# EAGLE board schematic3 (EAGLE 7.6.0)
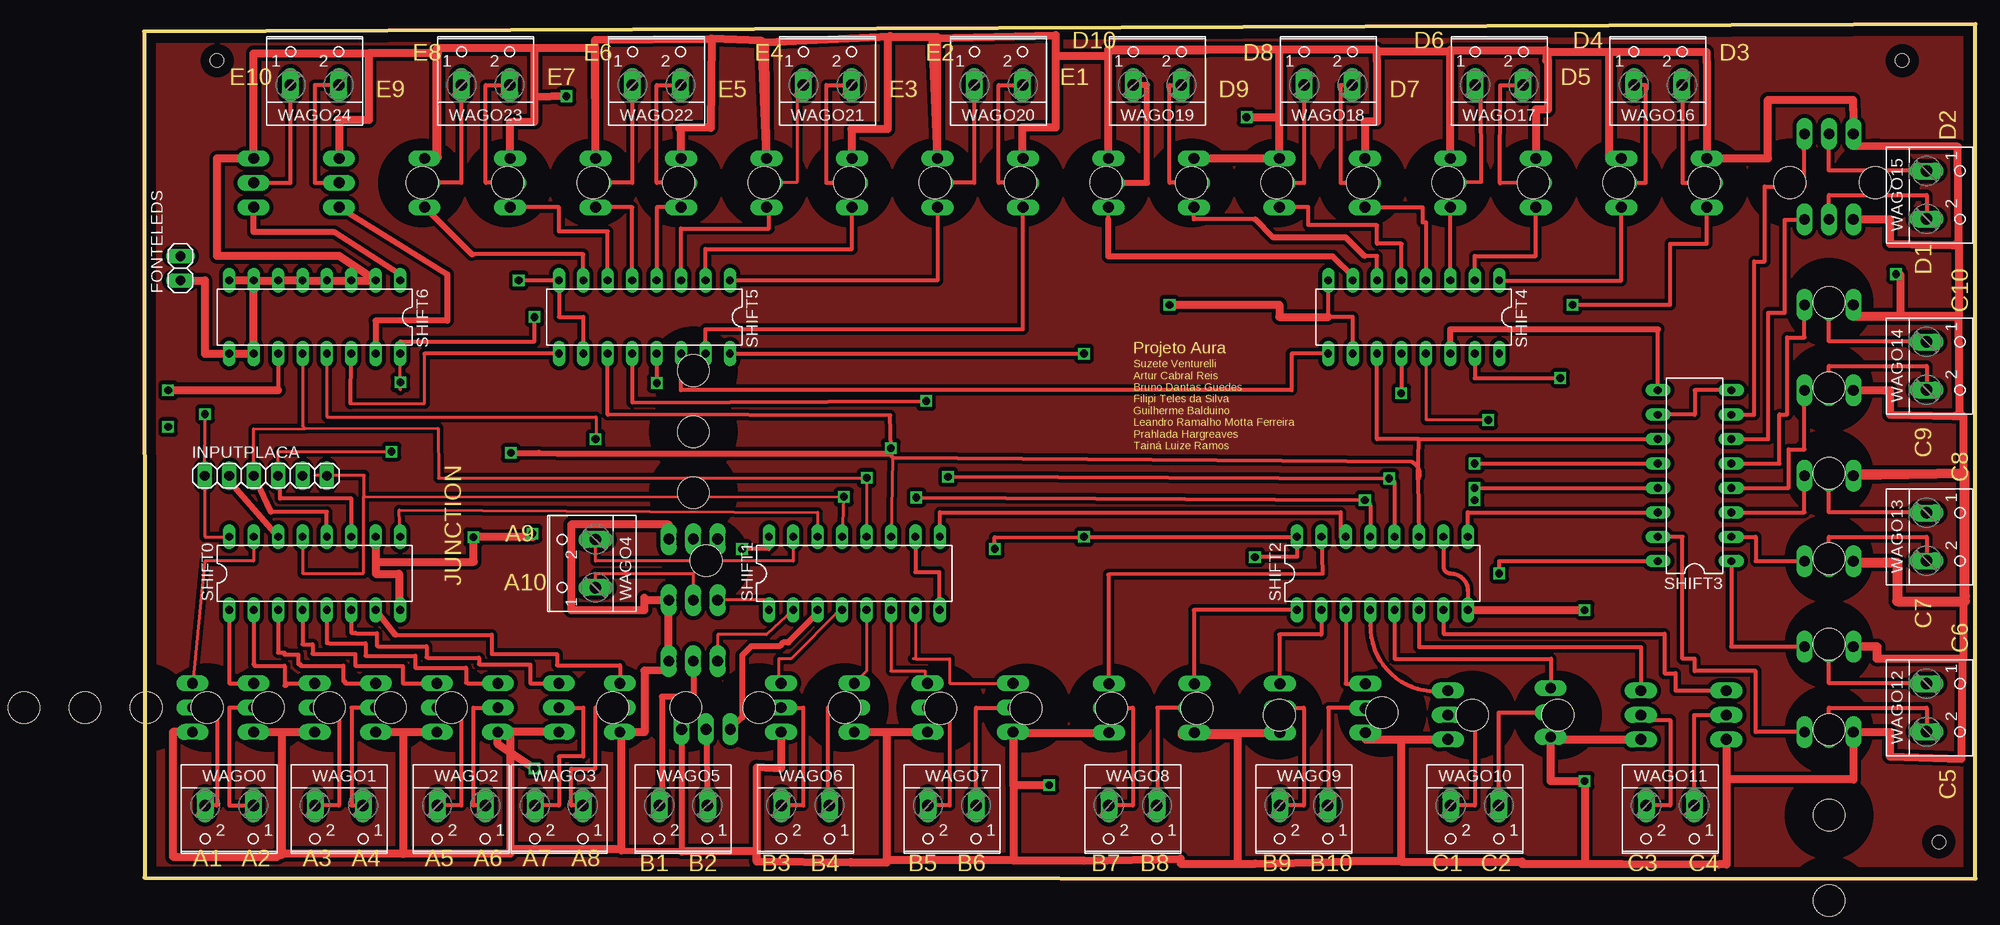
[diagram p0: board, top side]
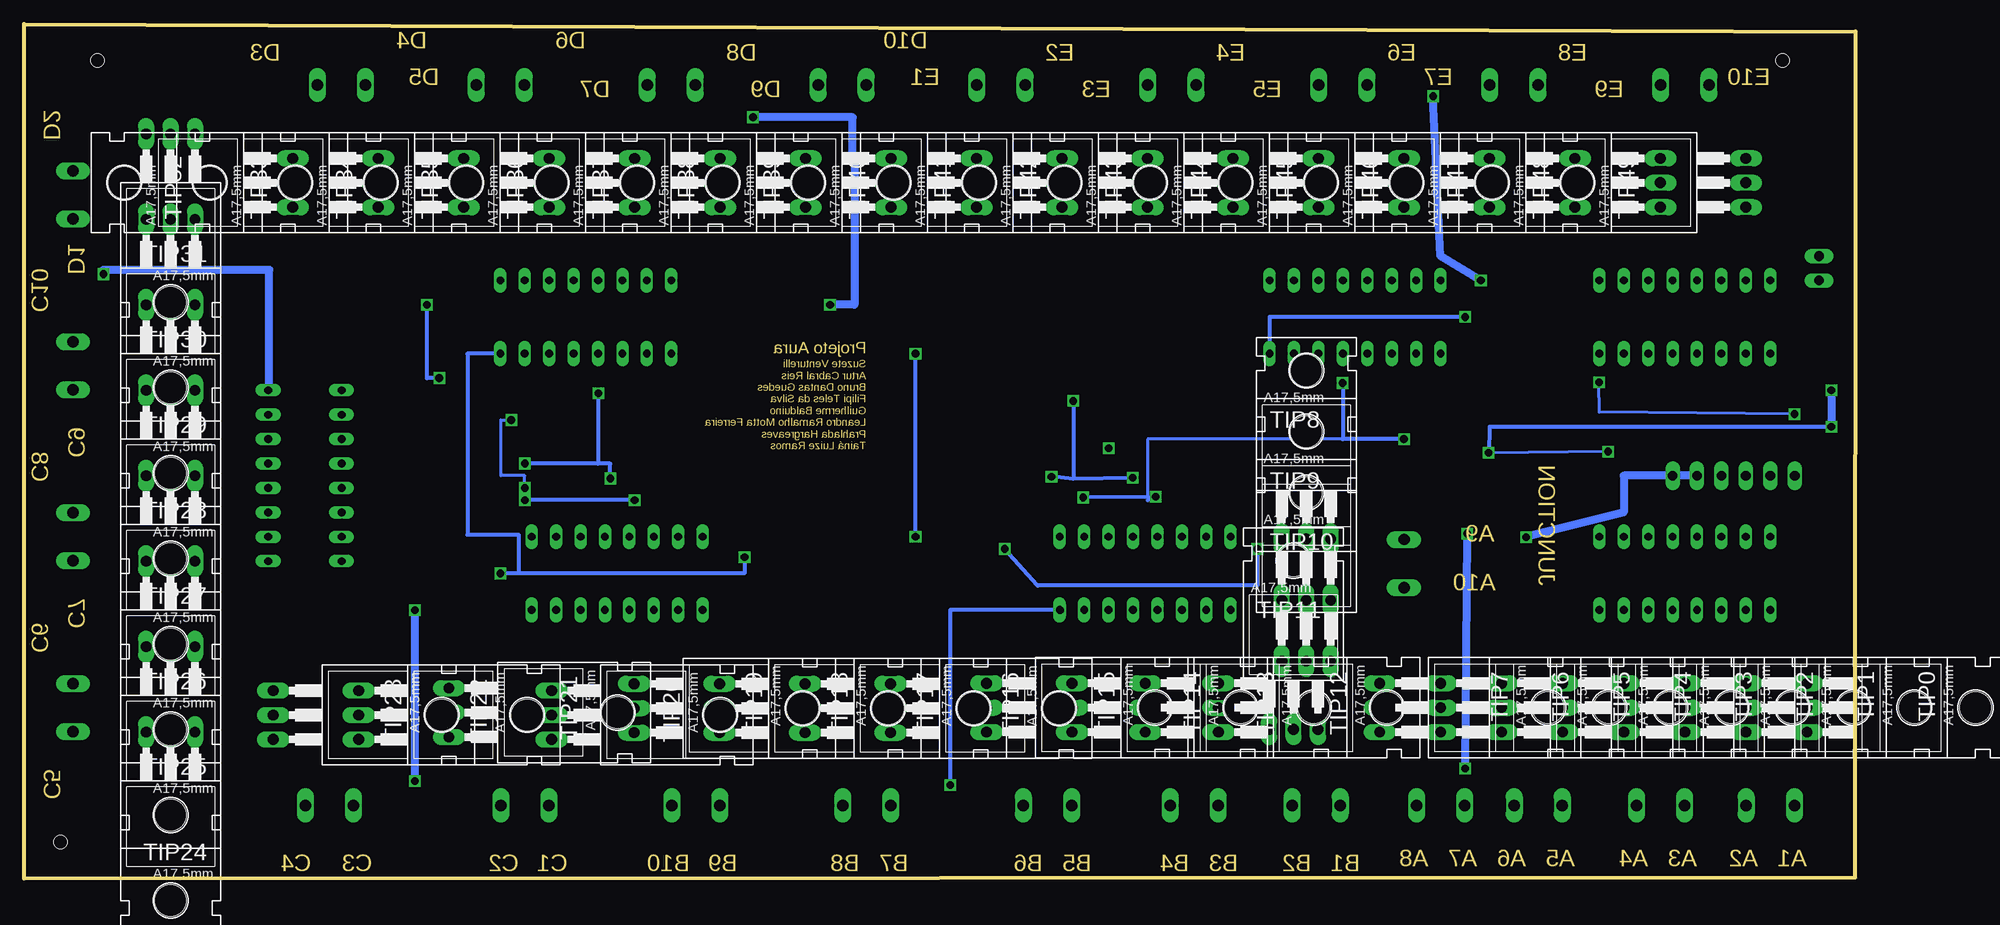
[diagram p1: board, bottom side, seen from below]

Size 190.45 x 88.9 mm. Coordinates in mm from the lower left corner, seen from the top.
Outline: 0.05,0.09 190.45,0 190.45,88.9 0,88.1 0.05,0.09
Copper layers (1*16): Top 0.035mm / dielectric 1.5mm / Bottom 0.035mm
Design rules "default": minimum track width 10mil, minimum drill 24mil, track to track 8mil, track to pad 8mil, pad to pad 8mil, via to via 8mil, smd to smd 8mil, copper to edge 40mil, drill to drill 8mil, minimum pad ring 10mil, minimum via ring 8mil, stop-mask expansion 4mil, vias tented up to drill 0mil, thermal gap 10mil
Holes 1.4 mm at 7.57,85.09 182.83,85.09 186.64,3.81 -16.56,34.29

## Footprints (pad centres in the part's own frame; a part is rotated, then mirrored left to right if it is on the bottom)
1X02 = drill 1.016 long: 1 -1.27,0; 2 1.27,0
1X06 = drill 1.016 long: 1 -6.35,0; 2 -3.81,0; 3 -1.27,0; 4 1.27,0; 5 3.81,0; 6 6.35,0
DIL16 = drill 0.813 long: 1 -8.89,-3.81; 2 -6.35,-3.81; 3 -3.81,-3.81; 4 -1.27,-3.81; 5 1.27,-3.81; 6 3.81,-3.81; 7 6.35,-3.81; 8 8.89,-3.81; 9 8.89,3.81; 10 6.35,3.81; 11 3.81,3.81; 12 1.27,3.81; 13 -1.27,3.81; 14 -3.81,3.81; 15 -6.35,3.81; 16 -8.89,3.81
TO220AH = drill 1.118 long: B -2.54,-6.35; C 0,-6.35; E 2.54,-6.35 | hole 3.302: 0,11.176
W237-102 = drill 1.194 long: 1 -2.5,-1.27; 2 2.5,-1.27

## Placement (x,y rotation side)
FONTELEDS  [1X02]  3.76,63.5 90 top
INPUTPLACA  [1X06]  12.65,41.91 0 top
SHIFT0  74HC595N  [DIL16]  17.73,31.75 0 top
SHIFT1  74HC595N  [DIL16]  73.85,31.75 0 top
SHIFT2  74HC595N  [DIL16]  128.77,31.75 0 top
SHIFT3  74HC595N  [DIL16]  161.24,41.91 90 top
SHIFT4  74HC595N  [DIL16]  132.03,58.42 180 top
SHIFT5  74HC595N  [DIL16]  52.02,58.42 180 top
SHIFT6  74HC595N  [DIL16]  17.73,58.42 180 top
TIP0  TIP120  [TO220AH]  -1.32,17.78 270 bottom
TIP1  TIP120  [TO220AH]  5.03,17.78 270 bottom
TIP2  TIP120  [TO220AH]  11.38,17.78 270 bottom
TIP3  TIP120  [TO220AH]  17.73,17.78 270 bottom
TIP4  TIP120  [TO220AH]  24.08,17.78 270 bottom
TIP5  TIP120  [TO220AH]  30.43,17.78 270 bottom
TIP6  TIP120  [TO220AH]  36.78,17.78 270 bottom
TIP7  TIP120  [TO220AH]  43.13,17.78 270 bottom
TIP8  TIP120  [TO220AH]  57.1,41.67 0 bottom
TIP9  TIP120  [TO220AH]  57.1,35.32 0 bottom
TIP10  TIP120  [TO220AH]  57.1,28.97 0 bottom
TIP11  TIP120  [TO220AH]  58.43,21.89 0 bottom
TIP12  TIP120  [TO220AH]  59.88,17.78 270 bottom
TIP13  TIP120  [TO220AH]  67.5,17.78 270 bottom
TIP14  TIP120  [TO220AH]  75.12,17.78 270 bottom
TIP15  TIP120  [TO220AH]  84.01,17.78 270 bottom
TIP16  TIP120  [TO220AH]  93.99,17.72 270 bottom
TIP17  TIP120  [TO220AH]  102.88,17.72 270 bottom
TIP18  TIP120  [TO220AH]  111.77,17.72 270 bottom
TIP19  TIP120  [TO220AH]  120.66,17.72 270 bottom
TIP20  TIP120  [TO220AH]  129.24,17.02 270 bottom
TIP21  TIP120  [TO220AH]  139.91,17.27 270 bottom
TIP22  TIP120  [TO220AH]  149.31,17.02 270 bottom
TIP23  TIP120  [TO220AH]  158.2,17.02 270 bottom
TIP24  TIP120  [TO220AH]  175.21,8.89 180 bottom
TIP25  TIP120  [TO220AH]  175.21,17.78 180 bottom
TIP26  TIP120  [TO220AH]  175.21,26.67 180 bottom
TIP27  TIP120  [TO220AH]  175.21,35.56 180 bottom
TIP28  TIP120  [TO220AH]  175.21,44.45 180 bottom
TIP29  TIP120  [TO220AH]  175.21,53.34 180 bottom
TIP30  TIP120  [TO220AH]  175.21,62.23 180 bottom
TIP31  TIP120  [TO220AH]  175.21,71.12 180 bottom
TIP32  TIP120  [TO220AH]  168.86,72.39 90 bottom
TIP33  TIP120  [TO220AH]  159.97,72.39 90 bottom
TIP34  TIP120  [TO220AH]  151.08,72.39 90 bottom
TIP35  TIP120  [TO220AH]  142.19,72.39 90 bottom
TIP36  TIP120  [TO220AH]  133.3,72.39 90 bottom
TIP37  TIP120  [TO220AH]  124.41,72.39 90 bottom
TIP38  TIP120  [TO220AH]  115.52,72.39 90 bottom
TIP39  TIP120  [TO220AH]  106.63,72.39 90 bottom
TIP40  TIP120  [TO220AH]  97.74,72.39 90 bottom
TIP41  TIP120  [TO220AH]  88.85,72.39 90 bottom
TIP42  TIP120  [TO220AH]  79.96,72.39 90 bottom
TIP43  TIP120  [TO220AH]  71.07,72.39 90 bottom
TIP44  TIP120  [TO220AH]  62.18,72.39 90 bottom
TIP45  TIP120  [TO220AH]  53.29,72.39 90 bottom
TIP46  TIP120  [TO220AH]  44.4,72.39 90 bottom
TIP47  TIP120  [TO220AH]  35.51,72.39 90 bottom
TIP48  TIP120  [TO220AH]  26.62,72.39 90 bottom
TIP49  TIP120  [TO220AH]  17.73,72.39 90 bottom
WAGO0  [W237-102]  8.84,6.35 180 top
WAGO1  [W237-102]  20.27,6.35 180 top
WAGO2  [W237-102]  32.97,6.35 180 top
WAGO3  [W237-102]  43.13,6.35 180 top
WAGO4  [W237-102]  45.67,32.78 90 top
WAGO5  [W237-102]  56.07,6.35 180 top
WAGO6  [W237-102]  68.77,6.35 180 top
WAGO7  [W237-102]  84.01,6.35 180 top
WAGO8  [W237-102]  102.82,6.35 180 top
WAGO9  [W237-102]  120.6,6.35 180 top
WAGO10  [W237-102]  138.38,6.35 180 top
WAGO11  [W237-102]  158.7,6.35 180 top
WAGO12  [W237-102]  186.64,17.78 270 top
WAGO13  [W237-102]  186.64,35.56 270 top
WAGO14  [W237-102]  186.64,53.34 270 top
WAGO15  [W237-102]  186.64,71.12 270 top
WAGO16  [W237-102]  157.43,83.82 0 top
WAGO17  [W237-102]  140.92,83.82 0 top
WAGO18  [W237-102]  123.14,83.82 0 top
WAGO19  [W237-102]  105.36,83.82 0 top
WAGO20  [W237-102]  88.85,83.82 0 top
WAGO21  [W237-102]  71.07,83.82 0 top
WAGO22  [W237-102]  53.29,83.82 0 top
WAGO23  [W237-102]  35.51,83.82 0 top
WAGO24  [W237-102]  17.73,83.82 0 top

## Library data of the parts
FONTELEDS INPUTPLACA = pinhead
SHIFT0 SHIFT1-SHIFT6 = 74xx-eu
TIP0 TIP1-TIP49 = transistor-power
WAGO0 WAGO1-WAGO24 = con-wago-500; MPN: 237-102; OC_FARNELL: unknown; OC_NEWARK: 70K9898

## Nets
GNDBOARD: SHIFT0.13 SHIFT1.13 SHIFT2.13 SHIFT3.13 SHIFT4.13 SHIFT5.13 SHIFT6.13
GNDLED: FONTELEDS.1 INPUTPLACA.5 SHIFT0.8 SHIFT0.10 SHIFT1.8 SHIFT1.10 SHIFT2.8 SHIFT2.10 SHIFT3.8 SHIFT3.10 SHIFT4.8 SHIFT4.10 SHIFT5.8 SHIFT5.10 SHIFT6.2 SHIFT6.3 SHIFT6.4 SHIFT6.5 SHIFT6.6 SHIFT6.7 SHIFT6.8 SHIFT6.9 SHIFT6.10 TIP0.E TIP1.E TIP2.E TIP3.E TIP4.E TIP5.E TIP6.E TIP7.E TIP8.E TIP9.E TIP10.E TIP11.E TIP12.E TIP13.E TIP14.E TIP15.E TIP16.E TIP17.E TIP18.E TIP19.E TIP20.E TIP21.E TIP22.E TIP23.E TIP24.E TIP25.E TIP26.E TIP27.E TIP28.E TIP29.E TIP30.E TIP31.E TIP32.E TIP33.E TIP34.E TIP35.E TIP36.E TIP37.E TIP38.E TIP39.E TIP40.E TIP41.E TIP42.E TIP43.E TIP44.E TIP45.E TIP46.E TIP47.E TIP48.E TIP49.E
N$1: SHIFT0.15 TIP0.B
N$2: SHIFT0.1 TIP1.B
N$3: SHIFT0.2 TIP2.B
N$4: SHIFT0.3 TIP3.B
N$5: SHIFT0.4 TIP4.B
N$6: SHIFT0.5 TIP5.B
N$7: SHIFT0.6 TIP6.B
N$8: SHIFT0.7 TIP7.B
N$9: SHIFT1.15 TIP8.B
N$10: SHIFT1.1 TIP9.B
N$11: SHIFT6.15 TIP48.B
N$12: SHIFT1.2 TIP10.B
N$13: SHIFT4.5 TIP37.B
N$14: SHIFT1.3 TIP11.B
N$15: SHIFT1.4 TIP12.B
N$16: SHIFT4.6 TIP38.B
N$17: SHIFT1.5 TIP13.B
N$18: SHIFT4.7 TIP39.B
N$19: SHIFT1.6 TIP14.B
N$20: SHIFT5.5 TIP45.B
N$21: SHIFT1.7 TIP15.B
N$22: TIP8.C WAGO4.2
N$23: TIP9.C WAGO4.1
N$24: TIP10.C WAGO5.2
N$25: TIP11.C WAGO5.1
N$26: TIP12.C WAGO6.2
N$27: TIP13.C WAGO6.1
N$28: TIP14.C WAGO7.2
N$29: TIP15.C WAGO7.1
N$30: SHIFT2.15 TIP16.B
N$31: SHIFT2.1 TIP17.B
N$32: SHIFT2.2 TIP18.B
N$33: SHIFT2.3 TIP19.B
N$34: SHIFT2.4 TIP20.B
N$35: SHIFT2.5 TIP21.B
N$36: SHIFT2.6 TIP22.B
N$37: SHIFT2.7 TIP23.B
N$38: TIP16.C WAGO8.2
N$39: TIP17.C WAGO8.1
N$40: TIP18.C WAGO9.2
N$41: TIP19.C WAGO9.1
N$42: TIP20.C WAGO10.2
N$43: TIP21.C WAGO10.1
N$44: SHIFT4.15 TIP32.B
N$45: TIP23.C WAGO11.1
N$46: SHIFT3.15 TIP24.B
N$47: SHIFT3.1 TIP25.B
N$48: SHIFT3.2 TIP26.B
N$49: SHIFT3.3 TIP27.B
N$50: SHIFT3.4 TIP28.B
N$51: SHIFT5.6 TIP46.B
N$52: SHIFT5.7 TIP47.B
N$53: TIP0.C WAGO0.2
N$54: SHIFT3.5 TIP29.B
N$55: SHIFT3.6 TIP30.B
N$56: SHIFT3.7 TIP31.B
N$57: TIP24.C WAGO12.2
N$58: TIP25.C WAGO12.1
N$59: TIP26.C WAGO13.2
N$60: SHIFT4.1 TIP33.B
N$61: SHIFT4.2 TIP34.B
N$62: SHIFT5.9 SHIFT6.14
N$63: TIP29.C WAGO14.1
N$64: TIP30.C WAGO15.2
N$65: TIP31.C WAGO15.1
N$66: SHIFT4.3 TIP35.B
N$67: SHIFT4.4 TIP36.B
N$70: TIP1.C WAGO0.1
N$72: TIP2.C WAGO1.2
N$73: TIP32.C WAGO16.2
N$74: TIP3.C WAGO1.1
N$75: TIP33.C WAGO16.1
N$76: TIP34.C WAGO17.2
N$77: TIP37.C WAGO18.1
N$78: TIP38.C WAGO19.2
N$79: TIP39.C WAGO19.1
N$80: SHIFT5.15 TIP40.B
N$81: SHIFT5.1 TIP41.B
N$82: SHIFT5.2 TIP42.B
N$83: SHIFT5.3 TIP43.B
N$84: SHIFT5.4 TIP44.B
N$88: TIP40.C WAGO20.2
N$89: TIP41.C WAGO20.1
N$90: TIP42.C WAGO21.2
N$91: TIP45.C WAGO22.1
N$92: TIP46.C WAGO23.2
N$93: TIP47.C WAGO23.1
N$96: TIP48.C WAGO24.2
N$97: TIP49.C WAGO24.1
N$99: SHIFT6.1 TIP49.B
N$166: TIP4.C WAGO2.2
N$168: TIP5.C WAGO2.1
N$170: TIP6.C WAGO3.2
N$172: TIP7.C WAGO3.1
SERIAL: INPUTPLACA.2 SHIFT0.14
SERIAL1: SHIFT0.9 SHIFT1.14
SERIAL2: SHIFT1.9 SHIFT2.14
SERIAL3: SHIFT2.9 SHIFT3.14
SERIAL4: SHIFT3.9 SHIFT4.14
SERIAL5: SHIFT4.9 SHIFT5.14
SERIALCLK: INPUTPLACA.4 SHIFT0.11 SHIFT1.11 SHIFT2.11 SHIFT3.11 SHIFT4.11 SHIFT5.11 SHIFT6.11
STORECLK: INPUTPLACA.3 SHIFT0.12 SHIFT1.12 SHIFT2.12 SHIFT3.12 SHIFT4.12 SHIFT5.12 SHIFT6.12
VCC: INPUTPLACA.1 SHIFT0.16 SHIFT1.16 SHIFT2.16 SHIFT3.16 SHIFT4.16 SHIFT5.16 SHIFT6.16
WAGO1: TIP35.C WAGO17.1
WAGO2: TIP36.C WAGO18.2
WAGO3: TIP43.C WAGO21.1
WAGO4: TIP44.C WAGO22.2
WAGO11: TIP22.C WAGO11.2
WAGO14: TIP27.C WAGO13.1
WAGO15: TIP28.C WAGO14.2

## Tracks (layer width: path | path; a pad name or v marks a point on that pad's centre or on a via)
GND
  pour Top (isolate 0.406): -0.25,0.04 -0.18,88.56 190.95,89.31 190.72,-0.21
GNDBOARD  (via drill 0.8)
  Top 0.305: 22.81,39.74 v72.76,39.71 SHIFT1.13 | SHIFT0.13 16.46,31.75 22.81,31.75 22.81,39.74 | SHIFT4.13 133.3,47.71 v139.79,47.71 | SHIFT6.13 19,48.03 47,48.03 47,45.72 v46.94,45.72 | 17.73,41.91 17.79,41.97 22.91,41.97 22.81,41.88 22.81,39.74
  Top 0.406: v80.31,39.64 v126.95,39.37 arc-90 127.5,38.82 SHIFT2.13 | v138.38,39.37 v138.38,40.64 SHIFT3.13 | SHIFT5.13 v53.32,51.55
  Bottom 0.305: 53.29,45.72 73.61,45.72 73.61,39.37 | v138.38,40.64 138.38,41.92 140.86,41.92 140.86,47.71 v139.79,47.71
  Bottom 0.406: 73.61,39.37 v72.76,39.71 v80.31,39.64 | v126.95,39.37 v138.38,39.37 | v53.32,51.55 53.29,45.72 v46.94,45.72
GNDLED  (via drill 0.8)
  Top 0.406: SHIFT1.10 80.2,31.89 82.68,31.89 v82.68,27.94 SHIFT1.8 | SHIFT2.10 135.12,32.47 arc90 135.84,31.75 arc-90 137.66,29.93 SHIFT2.8 | TIP15.E 90.36,15.18 | SHIFT3.8 161.24,50.8 161.24,48.26 SHIFT3.10 | SHIFT4.10 125.68,58.42 123.14,58.42 SHIFT4.8 | SHIFT5.10 45.67,58.42 43.13,58.42 SHIFT5.8 40.59,62.23 v38.95,62.23
  Top 0.61: TIP11.E 55.89,15.45 55.89,2.83 49.61,2.83 49.61,3.06
  Top 0.813: FONTELEDS.1 6.3,62.23 6.3,54.61 SHIFT6.9 SHIFT6.10 SHIFT6.7 | SHIFT6.7 SHIFT6.8 | SHIFT6.7 SHIFT6.6 SHIFT6.5 SHIFT6.4 SHIFT6.3 SHIFT6.2 20.27,64.77 7.57,64.77 7.57,74.93 TIP49.E 11.38,85.86 23.36,85.86 | TIP46.E 38.05,78.74 40.59,78.74 40.59,81.28 | 40.59,81.28 40.59,86.36 | 40.59,86.36 30.43,86.36 30.43,74.93 TIP47.E 29.16,75.02 30.54,75.02 30.54,85.86 23.36,85.86 | TIP39.E 100.28,86.18 110.44,86.18 | TIP38.E TIP37.E 118.06,79.21 | 118.06,79.21 118.06,86.27 | TIP36.E 126.95,78.74 128.22,78.74 128.22,85.09 128.15,85.09 128.15,86 | TIP35.E 135.84,85.09 | 146,85.09 146,80.01 144.73,80.01 TIP34.E | TIP33.E 152.35,74.93 152.35,86 | 162.51,85.09 162.51,84.95 | 162.51,84.95 TIP32.E 168.86,74.93 168.86,81.01 177.71,81.01 177.71,80.01 177.75,80.01 TIP31.E 177.75,76.2 188.62,76.13 188.69,65.88 188.08,65.89 | 100.28,15.18 TIP16.E 90.36,15.18 90.36,9.74 v94.14,9.74 | TIP17.E 109.23,15.24 107.9,15.24 107.9,15.18 | 118.06,15.18 TIP18.E 107.9,15.18 | TIP28.E 181.56,50.8 181.56,48.26 188.17,48.11 | 188.17,48.11 188.83,48.1 188.69,58.42 182.63,58.42 | 182.63,58.42 177.75,58.42 TIP29.E 177.75,58.56 188.76,58.56 188.76,65.89 188.08,65.89 | TIP30.E 181.56,68.58 181.56,66.04 188.08,65.89 | v43.91,81.39 40.59,81.28 | SHIFT2.8 v149.81,27.94 | v40.59,11.43 36.78,13.97 TIP5.E | TIP6.E TIP5.E | TIP4.E TIP3.E 26.95,15.24 26.95,2.6 | TIP1.E 14.38,15.24 | 14.38,15.24 TIP2.E | TIP8.E 54.56,36.83 44.4,36.83 44.4,27.94 52.02,27.94 52.02,28.97 | 52.02,29.21 52.02,28.97 | 52.02,28.97 TIP9.E TIP10.E 54.56,21.59 52.05,21.66 52.03,21.66 52.03,15.22 49.61,15.22 | TIP12.E 66.23,11.43 63.7,11.57 63.7,1.79 | 63.7,1.79 73.48,1.72 73.48,1.67 77.22,1.67 77.22,1.92
  Top 0.813: 73.61,15.24 TIP13.E | TIP13.E TIP14.E | v106.63,59.69 118.06,59.69 118.06,58.42 123.14,58.42 | v182.19,62.88 182.63,62.88 182.63,58.42 | v114.64,79.21 118.06,79.21 | v40.39,35.89 40.39,35.52 v34.24,35.52 34.29,35.52 34.29,32.96 24.08,32.96 SHIFT0.10 24.08,31.7 26.52,31.7 26.52,27.94 SHIFT0.8 | 49.61,15.22 49.48,15.22 TIP7.E | 94.8,85.56 94.8,87.76 82,87.41 TIP41.E 82.5,87.55 77.31,87.55 | 94.8,85.56 94.8,78.13 91.3,78.13 91.3,74.93 TIP40.E | 77.31,87.55 77.61,87.64 64.63,87 TIP43.E 64.22,87.14 59,87.39 | 77.31,87.55 77.31,77.97 73.56,77.97 73.56,74.93 TIP42.E | 59,87.39 46.9,87.25 TIP45.E 46.94,86.36 40.59,86.36 | 59,87.39 58.91,78.11 55.66,78.11 55.66,78.02 55.8,78.02 55.8,74.93 TIP44.E | 23.36,85.86 23.36,78.91 20.28,78.91 TIP48.E | TIP0.E 2.97,15.24 2.97,2.28 13.88,2.28 13.88,2.49 14.38,2.49 14.38,2.58 | 14.38,2.58 14.38,15.24 | 26.95,2.6 26.95,2.58 14.38,2.58 | TIP5.E 38.08,15.24 38.08,3.06 | 26.95,2.6 38.08,2.6 38.08,3.06 | 49.61,15.22 49.61,3.06 38.08,3.06 | 63.7,1.79 63.7,2.83 55.89,2.83 | TIP13.E 77.22,15.24 77.22,1.92 | TIP15.E 90.41,15.24 90.41,1.92 | 90.41,1.92 77.22,1.92 | 90.41,1.92 90.41,1.87 97.72,1.87 107.79,2.07 107.79,1.56 113.71,1.56 | 113.71,1.56 115.57,1.56 125.68,1.81 130.71,1.81 | 107.9,15.18 107.9,14.95 113.71,14.95 113.71,1.56 | TIP19.E 127.01,14.48 TIP20.E 135.59,14.42 130.71,14.42 130.71,1.81 | 130.71,1.81 130.71,1.75 143.33,1.75 143.33,1.54 149.81,1.54 | 149.81,1.54 153.65,1.54 163.76,1.47 164.55,1.47 164.55,10.31 | 149.81,1.54 v149.81,10.16 146.26,10.16 146.26,14.48 | TIP21.E 146.26,14.48 | 146.26,14.48 TIP22.E | TIP23.E 164.55,10.31 | 152.35,86 162.47,86 162.47,84.95 162.51,84.95
  Top 0.813: TIP35.E 135.84,86.18 145.82,86.18 145.82,85.09 146,85.09 | 118.06,86.27 128.15,86.27 128.15,86 | TIP39.E 100.28,86.27 118.06,86.27 | TIP35.E 135.84,86 128.15,86 | 146,85.09 146,86 152.35,86 | TIP39.E 100.28,85.56 94.8,85.56 | 189.35,29.37 189.24,29.37 189.24,22.9 180.16,22.9 180.16,24.14 TIP25.E 180.29,24.13 180.29,22.86 189.15,22.91 189.01,12.47 181.56,12.7 181.56,15.24 TIP24.E 177.75,10.31 164.55,10.31 | TIP27.E 177.75,42.17 189.24,42.17 189.24,48.11 188.17,48.11
  Top 1.016: TIP26.E 177.75,32.87 182.31,32.87 182.31,28.85 189.35,28.85 189.35,29.37 189.33,42.16 TIP27.E
  Bottom 0.406: v82.68,27.94 94.14,27.94 v94.14,9.74
  Bottom 0.813: v38.95,62.23 43.13,64.77 v43.91,81.39 | v149.81,27.94 v149.81,10.16 | v40.39,35.89 v40.59,11.43 | v106.63,59.69 104.09,59.69 104.09,74.93 104.29,74.93 104.29,79.18 114.64,79.18 v114.64,79.21 | INPUTPLACA.5 24.08,41.91 24.08,38.1 v34.24,35.52 | SHIFT3.8 164.96,50.8 164.96,63.32 182.19,63.32 v182.19,62.88
N$1
  Top 0.305: SHIFT0.15 11.38,33.02 6.3,33.02 TIP0.B
N$2
  Top 0.406: SHIFT0.1 8.84,20.32 TIP1.B
N$3
  Top 0.406: SHIFT0.2 11.38,22.33 11.45,22.33 11.45,22.15 14.61,22.15 14.61,20.07 14.79,20.07 14.79,20.32 TIP2.B
N$4
  Top 0.406: SHIFT0.3 13.92,23.52 14.61,23.52 14.61,23.32 16.03,23.32 16.03,22.33 16.28,22.33 16.28,22.15 20.71,22.15 20.71,20.53 20.89,20.53 20.89,20.32 TIP3.B
N$5
  Top 0.406: SHIFT0.4 16.46,24.37 17.51,24.37 17.51,23.38 17.58,23.38 17.58,23.36 21.95,23.36 21.95,22.17 22.01,22.17 22.01,22.1 26.91,22.1 26.91,20.32 TIP4.B
N$6
  Top 0.406: SHIFT0.5 19,24.5 19.23,24.5 19.23,24.48 23.02,24.48 23.02,23.18 28.19,23.18 28.19,21.92 33.47,21.92 33.47,20.41 33.6,20.41 33.6,20.32 TIP5.B
N$7
  Top 0.406: SHIFT0.6 21.54,25.58 21.99,25.58 21.99,25.51 24.19,25.51 24.19,24.23 24.28,24.23 24.28,24.16 29.38,24.16 29.38,23.04 29.47,23.04 29.47,22.97 34.82,22.97 34.82,22.29 34.98,22.29 34.98,22.26 40.17,22.26 40.17,20.32 TIP6.B
N$8
  Top 0.406: 26.13,25.37 36.14,25.37 36.14,23.36 42.93,23.36 42.93,22.2 49.48,22.2 TIP7.B
  Top 0.61: SHIFT0.7 26.13,25.37
N$9
  Top 0.305: SHIFT1.15 67.5,33.02 59.64,33.02 TIP8.B
N$10
  Top 0.305: SHIFT1.1 64.96,28.97 TIP9.B
N$11
  Top 0.61: TIP48.B 31.52,62.88 31.52,58.04 24.05,58.04 arc-90 24.08,58 SHIFT6.15
N$12
  Top 0.305: SHIFT1.2 64.72,25.4 59.64,25.4 TIP10.B
N$13
  Top 0.406: SHIFT4.5 130.76,66.04 128.22,66.04 128.22,67.96 121.06,67.99 121.06,69.87 TIP37.B
N$14
  Top 0.61: SHIFT1.3 70.04,27.61 66.98,24.55 66.45,24.55 66.07,24.16 63.14,24.16 62.2,23.22 62.2,16.77 TIP11.B
N$15
  Top 0.305: SHIFT1.4 72.34,27.94 67.26,22.86 65.99,22.86 65.99,20.56 TIP12.B
N$16
  Top 0.406: SHIFT4.6 128.22,64.77 126.95,64.77 | 115.52,68.58 109.17,68.58 TIP38.B
  Top 0.61: 126.95,64.77 126.91,64.77 124.98,66.7 117.4,66.7 115.52,68.58
N$17
  Top 0.305: SHIFT1.5 75.12,21.59 TIP13.B
N$18
  Top 0.406: 100.28,68.58 TIP39.B
  Top 0.61: SHIFT4.7 125.68,62.66 123.63,64.71 114.26,64.71 114.25,64.73 100.28,64.73 100.28,68.58
N$19
  Top 0.305: SHIFT1.6 77.66,21.59 81.23,21.59 81.23,20.32 TIP14.B
N$20
  Top 0.406: SHIFT5.5 50.75,69.85 TIP45.B
N$21
  Top 0.305: SHIFT1.7 80.2,22.86 | 80.2,22.86 79.96,22.86 | 80.2,22.86 83.77,22.86 83.77,20.32 TIP15.B
N$22
  Top 0.305: TIP8.C 57.1,33.02 46.94,33.02 WAGO4.2
N$23
  Top 0.305: WAGO4.1 46.94,31.75 57.1,31.75 TIP9.C
N$24
  Top 0.61: TIP10.C 57.13,22.6 57.13,18.95 57.1,18.93 53.84,18.93 53.88,18.88 53.88,7.62 WAGO5.2
N$25
  Top 0.61: TIP11.C WAGO5.1
N$26
  Top 0.406: TIP12.C 68.53,17.78 68.53,7.62 WAGO6.2
N$27
  Top 0.406: TIP13.C 71.07,17.78 71.07,7.62 WAGO6.1
N$28
  Top 0.406: TIP14.C 83.77,17.78 83.77,7.62 WAGO7.2
N$29
  Top 0.406: WAGO7.1 86.51,17.78 TIP15.C
N$30
  Top 0.406: SHIFT2.15 122.54,31.69 100.28,31.63 100.28,20.26 TIP16.B
N$31
  Top 0.406: SHIFT2.1 109.17,27.94 109.17,20.32
  Top 0.813: 109.17,20.32 109.17,20.26 TIP17.B
N$32
  Top 0.406: SHIFT2.2 122.42,25.4 118.06,25.4 118.06,20.26 TIP18.B
N$33
  Top 0.406: SHIFT2.3 124.96,20.26 TIP19.B
N$34
  Top 0.406: SHIFT2.4 127.5,26.3 arc90 134.3,19.5 135.53,19.5 arc90 TIP20.B
N$35
  Top 0.406: SHIFT2.5 130.04,22.88 146.3,22.88 146.3,19.81 TIP21.B
N$36
  Top 0.406: SHIFT2.6 132.58,24.09 155.68,24.09 155.68,19.56 TIP22.B
N$37
  Top 0.406: SHIFT2.7 135.12,25.46 158.12,25.46 158.12,21.37 159.27,21.37 159.27,19.56 TIP23.B
N$38
  Top 0.406: TIP16.C 100.34,17.78 102.82,17.78 102.82,7.62 WAGO8.2
N$39
  Top 0.406: TIP17.C 109.23,17.78 105.36,17.78 105.36,7.62 WAGO8.1
N$40
  Top 0.406: TIP18.C 118.12,17.78 120.6,17.78 120.6,7.62 WAGO9.2
N$41
  Top 0.406: TIP19.C 127.01,17.78 123.14,17.78 123.14,7.62 WAGO9.1
N$42
  Top 0.406: TIP20.C 135.59,16.51 138.38,16.51 138.38,7.62 WAGO10.2
N$43
  Top 0.406: WAGO10.1 140.88,17.27 TIP21.C
N$44  (via drill 0.8)
  Top 0.406: SHIFT4.15 138.38,52.07 v147.27,52.07 | v148.54,59.69 158.7,59.69 158.7,66.04 162.51,66.04 TIP32.B
  Bottom 0.406: v147.27,52.07 148.54,52.07 v148.54,59.69
N$45
  Top 0.406: WAGO11.1 161.2,17.02 TIP23.C
N$46
  Top 0.406: TIP24.B 167.59,15.24 167.59,21.59 161.24,21.59 161.24,22.86 159.97,22.86 159.97,35.56 SHIFT3.15
N$47
  Top 0.406: SHIFT3.1 165.05,24.13 TIP25.B
N$48
  Top 0.406: SHIFT3.2 167.59,35.56 167.59,33.02 TIP26.B
N$49
  Top 0.406: SHIFT3.3 172.67,38.1 TIP27.B
N$50
  Top 0.406: SHIFT3.4 171.04,40.64 171.04,44.64 172.67,44.64 TIP28.B
N$51
  Top 0.406: SHIFT5.6 48.21,67.31 43.13,67.31 43.13,69.85 TIP46.B
N$52
  Top 0.406: SHIFT5.7 45.67,64.94 34.13,64.94
  Top 0.61: 34.13,64.94 34.07,64.94 TIP47.B
N$53
  Top 0.406: TIP0.C 7.57,17.78 7.57,7.62 WAGO0.2
N$54
  Top 0.406: SHIFT3.5 170.06,43.18 170.06,48.3 170.88,48.3 170.88,56.3 172.67,56.3 TIP29.B
N$55
  Top 0.406: SHIFT3.6 168.89,45.72 168.89,58.86 170.6,58.86 170.6,68.53 172.67,68.53 TIP30.B
N$56
  Top 0.406: SHIFT3.7 167.45,48.26 167.45,64.19 168.52,64.19 168.52,71.98 172.67,71.98 TIP31.B
N$57
  Top 0.406: TIP24.C 175.21,17.78 185.37,17.78 WAGO12.2 185.37,15.24
N$58
  Top 0.406: WAGO12.1 185.37,20.32 175.21,20.32 TIP25.C
N$59
  Top 0.406: TIP26.C 175.21,35.56 185.37,35.56 WAGO13.2
N$60
  Top 0.406: SHIFT4.1 153.62,62.23 TIP33.B
N$61
  Top 0.406: SHIFT4.2 138.38,64.77 144.73,64.77 TIP34.B
N$62
  Top 0.305: 21.45,49.44 29.16,49.44 29.16,54.61
  Top 0.406: SHIFT5.9 29.16,54.61 | 21.45,49.44 SHIFT6.14
N$63
  Top 0.406: WAGO14.1 185.37,55.88 175.21,55.88 TIP29.C
N$64
  Top 0.406: TIP30.C 175.21,71.12 185.37,71.12 WAGO15.2
  Top 0.813: 185.37,68.58 WAGO15.2
N$65
  Top 0.406: WAGO15.1 185.37,73.66 175.21,73.66 TIP31.C
N$66
  Top 0.406: SHIFT4.3 TIP35.B
N$67
  Top 0.406: TIP36.B 132.95,69.85 132.95,68.28 133.3,68.28 SHIFT4.4
N$70
  Top 0.406: TIP1.C 8.84,17.78 8.84,7.62 WAGO0.1
N$72
  Top 0.406: TIP2.C 20.27,17.78 20.27,7.62 WAGO1.2
N$73
  Top 0.406: WAGO16.2 159.97,82.55 159.97,72.39 TIP32.C
N$74
  Top 0.406: 22.81,7.62 WAGO1.1 | TIP3.C 21.58,17.78 21.58,7.62 WAGO1.1 | 21.9,7.62 WAGO1.1
N$75
  Top 0.406: TIP33.C 156.16,72.39 156.16,82.55 WAGO16.1
N$76
  Top 0.406: TIP34.C 141.01,72.34 141.03,82.53 WAGO17.2
N$77
  Top 0.406: TIP37.C 120.64,72.39 WAGO18.1
N$78
  Top 0.406: TIP38.C 106.63,72.39 106.63,82.55 WAGO19.2
N$79
  Top 0.61: TIP39.C 104.31,72.39 104.31,82.55 WAGO19.1
N$80
  Top 0.406: SHIFT5.15 58.37,57.15 91.39,57.15 TIP40.B
N$81
  Top 0.406: TIP41.B 82.5,62.23 SHIFT5.1
N$82
  Top 0.406: SHIFT5.2 58.37,65.49 73.61,65.49 TIP42.B
N$83
  Top 0.406: SHIFT5.3 55.83,67.62 64.97,67.62 64.97,69.85 TIP43.B
N$84
  Top 0.406: TIP44.B 53.29,69.85 SHIFT5.4
N$88
  Top 0.406: TIP40.C 88.85,72.39 88.85,82.55 WAGO20.2
N$89
  Top 0.406: WAGO20.1 86.31,82.55 86.31,72.39 TIP41.C
N$90
  Top 0.406: TIP42.C 73.61,72.35 70.96,72.35 70.96,82.55 WAGO21.2
N$91
  Top 0.406: WAGO22.1 50.75,82.55 50.75,72.39 TIP45.C
N$92
  Top 0.406: TIP46.C 35.51,72.39 35.51,82.55 WAGO23.2 38.05,82.55
N$93
  Top 0.406: WAGO23.1 32.97,82.55 32.97,72.39 TIP47.C
N$96
  Top 0.406: WAGO24.2 17.73,82.55 17.73,72.39 TIP48.C
N$97
  Top 0.406: TIP49.C 15.23,72.39 WAGO24.1
N$99
  Top 0.61: SHIFT6.1 26.63,62.84 19.77,67.23 11.38,67.27 TIP49.B
N$166
  Top 0.406: TIP4.C 32.97,17.78 32.97,7.62 WAGO2.2
N$168
  Top 0.406: WAGO2.1 34.24,7.62 34.24,17.78 TIP5.C
N$170
  Top 0.406: TIP6.C 45.67,17.78 45.67,12.7 43.13,12.7 43.13,7.62 WAGO3.2
N$172
  Top 0.406: WAGO3.1 44.4,7.62 44.4,11.43 46.94,11.43 46.94,17.78 TIP7.C
SERIAL
  Top 0.61: SHIFT0.14 9.28,40.89 INPUTPLACA.2
SERIAL1
  Top 0.305: SHIFT0.9 26.53,38.35 70.04,38.1 SHIFT1.14
SERIAL2
  Top 0.406: SHIFT1.9 82.74,38.1 124.41,38.1 124.41,35.56 SHIFT2.14
SERIAL3
  Top 0.406: SHIFT2.9 137.66,38.1 SHIFT3.14
SERIAL4
  Top 0.406: SHIFT3.9 157.43,57.15
  Top 0.61: SHIFT4.14 135.84,57.15 157.43,57.15
SERIAL5
  Top 0.406: SHIFT4.9 119.33,54.61 119.33,50.8 55.83,50.8 SHIFT5.14
SERIALCLK  (via drill 0.8)
  Top 0.305: INPUTPLACA.4 13.92,44.45 v25.72,44.42 | 77.85,43.83 SHIFT1.11
  Top 0.406: 132.49,41.5 arc90 131.83,43.37 77.85,43.83 77.66,44.21 v77.65,44.77 77.58,48.19 48.21,48.26 SHIFT5.11 | 132.49,41.5 SHIFT2.11 | 132.49,41.5 132.58,45.72 | 132.58,45.72 SHIFT3.11 | 132.58,45.72 128.22,45.72 SHIFT4.11 | SHIFT6.11 13.92,50.8 | SHIFT0.11 21.56,35.57 21.56,39.52 14.13,39.52 14.13,41.91 INPUTPLACA.4
  Top 0.61: v38.12,44.29 41.07,44.29 42.95,44.21 77.66,44.21
  Top 0.813: v2.49,50.8 13.92,50.8
  Bottom 0.305: v25.72,44.42 v38.12,44.29
  Bottom 0.406: v2.49,46.99 38.05,46.99 v38.12,44.29
  Bottom 0.813: v2.49,50.8 v2.49,46.99
STORECLK  (via drill 0.8)
  Top 0.305: INPUTPLACA.3 11.38,46.79 16.74,46.82 | 16.74,46.82 30.57,46.85 30.62,41.67 v75.15,41.69 SHIFT1.12 | SHIFT6.12 16.46,47.09 16.74,46.82
  Top 0.406: v83.6,41.81 v129.49,41.62 arc-90 130.04,41.07 SHIFT2.12 | v138.38,43.18 SHIFT3.12 | SHIFT4.12 v130.74,50.49 | SHIFT5.12 50.75,49.53 v81.33,49.69 | SHIFT0.12 19,38.15 13.17,38.15
  Top 0.61: 13.17,38.15 INPUTPLACA.3
  Bottom 0.406: v75.15,41.69 81.33,41.58 | 81.33,41.58 v83.6,41.81 | v129.49,41.62 129.49,43.18 130.76,43.18 | 130.76,43.18 v138.38,43.18 | v130.74,50.49 130.76,43.18 | v81.33,49.69 81.33,41.58
VCC  (via drill 0.8, 0.8 pad 0.41)
  Top 0.305: SHIFT0.16 6.3,35.56 INPUTPLACA.1 v6.33,48.32 | v26.65,51.62 26.62,50.84 SHIFT6.16
  Top 0.406: SHIFT1.16 64.96,34.29 v62.18,34.29 | v88.47,34.29 88.45,35.49 v97.74,35.56 SHIFT2.16 119.91,33.47 v115.52,33.44 | v140.92,31.75 140.92,33.02 SHIFT3.16 | SHIFT5.16 v97.74,54.61 | SHIFT6.16 26.62,55.88 40.59,55.88 v40.59,58.42
  Bottom 0.305: v6.33,48.32 26.63,48.53 v26.65,51.62
  Bottom 0.406: v62.18,34.29 62.18,30.48 85.04,30.48 v88.47,34.29 | v115.52,33.44 115.52,31.75 139.03,31.75 | 139.03,31.75 v140.92,31.75 | v97.74,35.56 v97.74,54.61 | v40.59,58.42 60.91,58.42 SHIFT5.16 | SHIFT4.16 144.34,54.61 144.34,35.8 139.03,35.8 139.03,31.75
WAGO1
  Top 0.406: WAGO17.1 138.98,82.55 139.02,72.46 TIP35.C
WAGO2
  Top 0.406: WAGO18.2 124.41,82.55 124.41,72.39 TIP36.C
WAGO3
  Top 0.305: TIP43.C 64.72,72.46 67.94,72.46 67.94,82.55 WAGO21.1
  Top 0.406: WAGO21.1 68.53,82.55
WAGO4
  Top 0.406: TIP44.C 53.29,72.39 53.29,82.55 WAGO22.2
WAGO11
  Top 0.406: TIP22.C 155.66,16.51 158.7,16.51 158.7,7.62 WAGO11.2
WAGO14
  Top 0.406: WAGO13.1 185.37,38.1 175.21,38.1 TIP27.C
WAGO15
  Top 0.406: TIP28.C 175.21,53.34 185.37,53.34 WAGO14.2

## Text on the board
Dimension: D10 | D6 | D4 | E8 | E6 | E4 | E2 | D8 | D3 | E10 | E7 | E1 | D5 | E9 | E5 | E3 | D9 | D7 | D2 | D1 | C10 | Projeto Aura | C9 | Suzete Venturelli / Artur Cabral Reis / Bruno Dantas Guedes / Filipi Teles da Silva / Guilherme Balduino / Leandro Ramalho Motta Ferreira / Prahlada Hargreaves / Tainá Luize Ramos | C8 | A9 | A10 | JUNCTION | C7 | C6 | C5 | B1 | B2 | B3 | B4 | B5 | B6 | B7 | B8 | B9 | B10 | C1 | C2 | C3 | C4 | A1 | A2 | A3 | A4 | A5 | A6 | A7 | A8
Document: GND | S-3-4-5-GND | GND